# Altium PCB PCB.PcbDoc
Units mm, origin at the board's own origin, x right, y up, seen from the top; angles counter-clockwise.
Board outline 291.75 x 101.25 mm, 2 copper layers (Top Layer, Bottom Layer), stack 1.571 mm thick; 126 components, 18 nets, 931 pads, 0 vias.
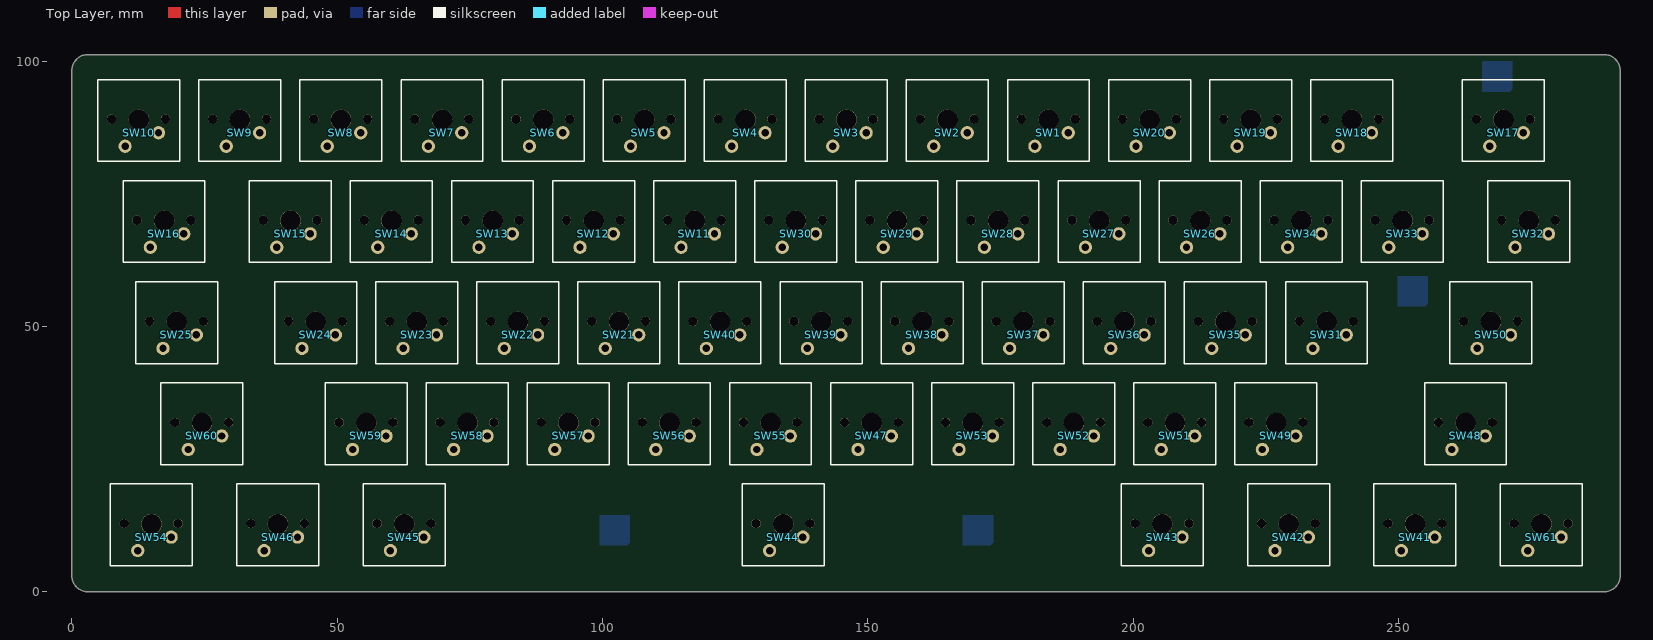
[diagram p0: Top Layer view]
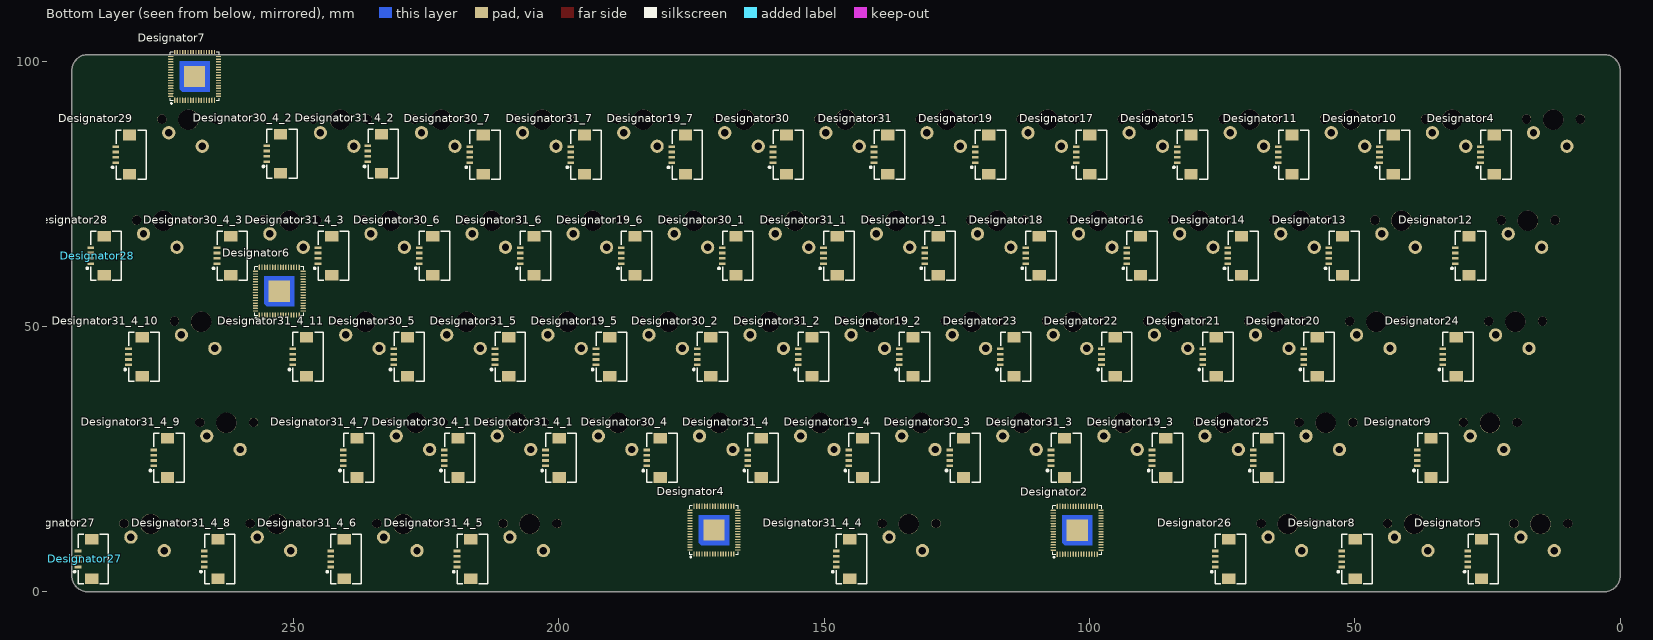
[diagram p1: Bottom Layer view, seen from below]

## Layer stack, top to bottom
Top Solder: solder mask 0.0102, Solder Resist, Dk 3.5
Top Layer: signal copper 0.0356
Dielectric 1: dielectric 1.5, FR-4, Dk 4.8
Bottom Layer: signal copper 0.0356
Bottom Solder: solder mask 0.0102, Solder Resist, Dk 3.5

## Board outline
0.006,3.006 0.006,98.256 cw(c3.006,98.256) 3.006,101.256 288.756,101.256 cw(c288.756,98.256) 291.756,98.256 291.756,3.006 cw(c288.756,3.006) 288.756,0.006 3.006,0.006 cw(c3.006,3.006)

## Design rules (kind name [scope] priority, off if disabled: settings)
Clearance [All] p1: gap=0.254 ignorepadtopadclearanceinfootprint=FALSE except(0: Arc-Hole Track-Hole SMDPad-Hole THPad-Hole Via-Hole Fill-Hole Poly-Hole Region-Hole Text-Hole)
PolygonConnect [All] p1: connectstyle=Relief reliefconductorwidth=0.254 reliefentries=4 polygonreliefangle="90 Angle" airgapwidth=0.254
RoutingVias [All] p1: holewidth=0.711 width=1.27 viastyle="Through Hole" minholewidth=0.711 minwidth=1.27 maxholewidth=0.711 maxwidth=1.27
SolderMaskExpansion [All] p1: expansion=0.102 istentingtop=FALSE
Width [All] p1: maxlimit=0.254 minlimit=0.254 preferedwidth=0.254
30 further rules are at their usual default settings.

## Classes and differential pairs
component class Connector: SW54

## Components (designator, comment, footprint, x,y, rotation, side; value= is the part's Value field where it differs from the comment)
Designator2 "Comment" "QFN64 9x9_L" 102.311,11.608 r180 bottom
Designator4 "Comment" FPC1.0-WT-4P 23.724,82.398 r90 bottom
Designator4 "Comment" "QFN64 9x9_L" 170.764,11.633 r180 bottom
Designator5 "Comment" FPC1.0-WT-4P 26.105,6.198 r90 bottom
Designator6 "Comment" "QFN64 9x9_L" 252.679,56.667 r180 bottom
Designator7 "Comment" "QFN64 9x9_L" 268.63,97.13 r180 bottom
Designator8 "Comment" FPC1.0-WT-4P 49.917,6.198 r90 bottom
Designator9 "Comment" FPC1.0-WT-4P 35.63,25.248 r90 bottom
Designator10 "Comment" FPC1.0-WT-4P 42.774,82.398 r90 bottom
Designator11 "Comment" FPC1.0-WT-4P 61.824,82.398 r90 bottom
Designator12 "Comment" FPC1.0-WT-4P 28.486,63.348 r90 bottom
Designator13 "Comment" FPC1.0-WT-4P 52.299,63.348 r90 bottom
Designator14 "Comment" FPC1.0-WT-4P 71.349,63.348 r90 bottom
Designator15 "Comment" FPC1.0-WT-4P 80.874,82.398 r90 bottom
Designator16 "Comment" FPC1.0-WT-4P 90.399,63.348 r90 bottom
Designator17 "Comment" FPC1.0-WT-4P 99.924,82.398 r90 bottom
Designator18 "Comment" FPC1.0-WT-4P 109.449,63.348 r90 bottom
Designator19 "Comment" FPC1.0-WT-4P 118.974,82.398 r90 bottom
Designator19_1 "Comment" FPC1.0-WT-4P 128.499,63.348 r90 bottom
Designator19_2 "Comment" FPC1.0-WT-4P 133.261,44.298 r90 bottom
Designator19_3 "Comment" FPC1.0-WT-4P 85.636,25.248 r90 bottom
Designator19_4 "Comment" FPC1.0-WT-4P 142.786,25.248 r90 bottom
Designator19_5 "Comment" FPC1.0-WT-4P 190.411,44.298 r90 bottom
Designator19_6 "Comment" FPC1.0-WT-4P 185.649,63.348 r90 bottom
Designator19_7 "Comment" FPC1.0-WT-4P 176.124,82.398 r90 bottom
Designator20 "Comment" FPC1.0-WT-4P 57.061,44.298 r90 bottom
Designator21 "Comment" FPC1.0-WT-4P 76.111,44.298 r90 bottom
Designator22 "Comment" FPC1.0-WT-4P 95.161,44.298 r90 bottom
Designator23 "Comment" FPC1.0-WT-4P 114.211,44.298 r90 bottom
Designator24 "Comment" FPC1.0-WT-4P 30.867,44.298 r90 bottom
Designator25 "Comment" FPC1.0-WT-4P 66.586,25.248 r90 bottom
Designator26 "Comment" FPC1.0-WT-4P 73.73,6.198 r90 bottom
Designator27 "Comment" FPC1.0-WT-4P 288.042,6.198 r90 bottom
Designator28 "Comment" FPC1.0-WT-4P 285.661,63.348 r90 bottom
Designator29 "Comment" FPC1.0-WT-4P 280.899,82.398 r90 bottom
Designator30 "Comment" FPC1.0-WT-4P 157.074,82.398 r90 bottom
Designator30_1 "Comment" FPC1.0-WT-4P 166.599,63.348 r90 bottom
Designator30_2 "Comment" FPC1.0-WT-4P 171.361,44.298 r90 bottom
Designator30_3 "Comment" FPC1.0-WT-4P 123.736,25.248 r90 bottom
Designator30_4 "Comment" FPC1.0-WT-4P 180.886,25.248 r90 bottom
Designator30_4_1 "Comment" FPC1.0-WT-4P 218.986,25.248 r90 bottom
Designator30_4_2 "Comment" FPC1.0-WT-4P 252.455,82.568 r90 bottom
Designator30_4_3 "Comment" FPC1.0-WT-4P 261.849,63.348 r90 bottom
Designator30_5 "Comment" FPC1.0-WT-4P 228.511,44.298 r90 bottom
Designator30_6 "Comment" FPC1.0-WT-4P 223.749,63.348 r90 bottom
Designator30_7 "Comment" FPC1.0-WT-4P 214.224,82.398 r90 bottom
Designator31 "Comment" FPC1.0-WT-4P 138.024,82.398 r90 bottom
Designator31_1 "Comment" FPC1.0-WT-4P 147.549,63.348 r90 bottom
Designator31_2 "Comment" FPC1.0-WT-4P 152.311,44.298 r90 bottom
Designator31_3 "Comment" FPC1.0-WT-4P 104.686,25.248 r90 bottom
Designator31_4 "Comment" FPC1.0-WT-4P 161.836,25.248 r90 bottom
Designator31_4_1 "Comment" FPC1.0-WT-4P 199.936,25.248 r90 bottom
Designator31_4_2 "Comment" FPC1.0-WT-4P 233.405,82.568 r90 bottom
Designator31_4_3 "Comment" FPC1.0-WT-4P 242.799,63.348 r90 bottom
Designator31_4_4 "Comment" FPC1.0-WT-4P 145.167,6.198 r90 bottom
Designator31_4_5 "Comment" FPC1.0-WT-4P 216.605,6.198 r90 bottom
Designator31_4_6 "Comment" FPC1.0-WT-4P 240.417,6.198 r90 bottom
Designator31_4_7 "Comment" FPC1.0-WT-4P 238.036,25.248 r90 bottom
Designator31_4_8 "Comment" FPC1.0-WT-4P 264.23,6.198 r90 bottom
Designator31_4_9 "Comment" FPC1.0-WT-4P 273.754,25.248 r90 bottom
Designator31_4_10 "Comment" FPC1.0-WT-4P 278.517,44.298 r90 bottom
Designator31_4_11 "Comment" FPC1.0-WT-4P 247.561,44.298 r90 bottom
Designator31_5 "Comment" FPC1.0-WT-4P 209.461,44.298 r90 bottom
Designator31_6 "Comment" FPC1.0-WT-4P 204.699,63.348 r90 bottom
Designator31_7 "Comment" FPC1.0-WT-4P 195.174,82.398 r90 bottom
SW1 "Cherry" SW_Cherry_MX_WS2812 184.069,88.983 r180 top
SW2 "Cherry" SW_Cherry_MX_WS2812 165.019,88.983 r180 top
SW3 "Cherry" SW_Cherry_MX_WS2812 145.969,88.983 r180 top
SW4 "Cherry" SW_Cherry_MX_WS2812 126.919,88.983 r180 top
SW5 "Cherry" SW_Cherry_MX_WS2812 107.869,88.983 r180 top
SW6 "Cherry" SW_Cherry_MX_WS2812 88.819,88.983 r180 top
SW7 "Cherry" SW_Cherry_MX_WS2812 69.769,88.983 r180 top
SW8 "Cherry" SW_Cherry_MX_WS2812 50.719,88.983 r180 top
SW9 "Cherry" SW_Cherry_MX_WS2812 31.669,88.983 r180 top
SW10 "Cherry" SW_Cherry_MX_WS2812 12.619,88.983 r180 top
SW11 "Cherry" SW_Cherry_MX_WS2812 117.394,69.933 r180 top
SW12 "Cherry" SW_Cherry_MX_WS2812 98.344,69.933 r180 top
SW13 "Cherry" SW_Cherry_MX_WS2812 79.294,69.933 r180 top
SW14 "Cherry" SW_Cherry_MX_WS2812 60.244,69.933 r180 top
SW15 "Cherry" SW_Cherry_MX_WS2812 41.194,69.933 r180 top
SW16 "Cherry" SW_Cherry_MX_WS2812 17.382,69.933 r180 top
SW17 "Cherry" SW_Cherry_MX_WS2812 269.794,88.983 r180 top
SW18 "Cherry" SW_Cherry_MX_WS2812 241.219,88.983 r180 top
SW19 "Cherry" SW_Cherry_MX_WS2812 222.169,88.983 r180 top
SW20 "Cherry" SW_Cherry_MX_WS2812 203.119,88.983 r180 top
SW21 "Cherry" SW_Cherry_MX_WS2812 103.106,50.883 r180 top
SW22 "Cherry" SW_Cherry_MX_WS2812 84.056,50.883 r180 top
SW23 "Cherry" SW_Cherry_MX_WS2812 65.006,50.883 r180 top
SW24 "Cherry" SW_Cherry_MX_WS2812 45.956,50.883 r180 top
SW25 "Cherry" SW_Cherry_MX_WS2812 19.763,50.883 r180 top
SW26 "Cherry" SW_Cherry_MX_WS2812 212.644,69.933 r180 top
SW27 "Cherry" SW_Cherry_MX_WS2812 193.594,69.933 r180 top
SW28 "Cherry" SW_Cherry_MX_WS2812 174.544,69.933 r180 top
SW29 "Cherry" SW_Cherry_MX_WS2812 155.494,69.933 r180 top
SW30 "Cherry" SW_Cherry_MX_WS2812 136.444,69.933 r180 top
SW31 "Cherry" SW_Cherry_MX_WS2812 236.456,50.883 r180 top
SW32 "Cherry" SW_Cherry_MX_WS2812 274.557,69.933 r180 top
SW33 "Cherry" SW_Cherry_MX_WS2812 250.744,69.933 r180 top
SW34 "Cherry" SW_Cherry_MX_WS2812 231.694,69.933 r180 top
SW35 "Cherry" SW_Cherry_MX_WS2812 217.406,50.883 r180 top
SW36 "Cherry" SW_Cherry_MX_WS2812 198.356,50.883 r180 top
SW37 "Cherry" SW_Cherry_MX_WS2812 179.306,50.883 r180 top
SW38 "Cherry" SW_Cherry_MX_WS2812 160.256,50.883 r180 top
SW39 "Cherry" SW_Cherry_MX_WS2812 141.206,50.883 r180 top
SW40 "Cherry" SW_Cherry_MX_WS2812 122.156,50.883 r180 top
SW41 "Cherry" SW_Cherry_MX_WS2812 253.126,12.783 r180 top
SW42 "Cherry" SW_Cherry_MX_WS2812 229.313,12.783 r180 top
SW43 "Cherry" SW_Cherry_MX_WS2812 205.501,12.783 r180 top
SW44 "Cherry" SW_Cherry_MX_WS2812 134.063,12.783 r180 top
SW45 "Cherry" SW_Cherry_MX_WS2812 62.626,12.783 r180 top
SW46 "Cherry" SW_Cherry_MX_WS2812 38.813,12.783 r180 top
SW47 "Cherry" SW_Cherry_MX_WS2812 150.731,31.833 r180 top
SW48 "Cherry" SW_Cherry_MX_WS2812 262.65,31.833 r180 top
SW49 "Cherry" SW_Cherry_MX_WS2812 226.931,31.833 r180 top
SW50 "Cherry" SW_Cherry_MX_WS2812 267.413,50.883 r180 top
SW51 "Cherry" SW_Cherry_MX_WS2812 207.881,31.833 r180 top
SW52 "Cherry" SW_Cherry_MX_WS2812 188.831,31.833 r180 top
SW53 "Cherry" SW_Cherry_MX_WS2812 169.781,31.833 r180 top
SW54 "Cherry" SW_Cherry_MX_WS2812 15.001,12.783 r180 top
SW55 "Cherry" SW_Cherry_MX_WS2812 131.681,31.833 r180 top
SW56 "Cherry" SW_Cherry_MX_WS2812 112.631,31.833 r180 top
SW57 "Cherry" SW_Cherry_MX_WS2812 93.581,31.833 r180 top
SW58 "Cherry" SW_Cherry_MX_WS2812 74.531,31.833 r180 top
SW59 "Cherry" SW_Cherry_MX_WS2812 55.481,31.833 r180 top
SW60 "Cherry" SW_Cherry_MX_WS2812 24.526,31.833 r180 top
SW61 "Cherry" SW_Cherry_MX_WS2812 276.938,12.783 r180 top

## Footprints (in the part's own frame and the unit in brackets; to place one, negate y for a bottom-side part, rotate by r counter-clockwise, add the part's x,y. Pads: shape width x height; smd on the part's side, far side on the other; paste and mask are expansions set on the pad)
FPC1.0-WT-4P [mm] "卧贴翻盖FPC，脚距1mm，不含脚（长8.9mm，宽5.2mm，高1.96mm）"
  rect 2x2.5 smd: 0(-3.69,0) 0(3.69,0)
  rect 0.5x1.25 smd: 1(-1.5,2.575) 2(-0.5,2.575) 3(0.5,2.575) 4(1.5,2.575)
  silkscreen extent -4.64,-3.18 4.64,3.31, body extent -4.45,-3.15 4.45,2.85, height 2
"QFN64 9x9_L" [mm] "64脚，长x宽x高：9x9x1mm，脚距：0.5mm"
  rect 0.25x1 smd: 1(-3.75,-4.5)
  oval 0.25x1 smd: 2(-3.25,-4.5) 3(-2.75,-4.5) 4(-2.25,-4.5) 5(-1.75,-4.5) 6(-1.25,-4.5) 7(-0.75,-4.5) 8(-0.25,-4.5) 9(0.25,-4.5) 10(0.75,-4.5) 11(1.25,-4.5) 12(1.75,-4.5) 13(2.25,-4.5) 14(2.75,-4.5) 15(3.25,-4.5) 16(3.75,-4.5) 33(3.75,4.5) 34(3.25,4.5) 35(2.75,4.5) 36(2.25,4.5) 37(1.75,4.5) 38(1.25,4.5) 39(0.75,4.5) 40(0.25,4.5) 41(-0.25,4.5) 42(-0.75,4.5) 43(-1.25,4.5) 44(-1.75,4.5) 45(-2.25,4.5) 46(-2.75,4.5) 47(-3.25,4.5) 48(-3.75,4.5)
  oval 1x0.25 smd: 17(4.5,-3.75) 18(4.5,-3.25) 19(4.5,-2.75) 20(4.5,-2.25) 21(4.5,-1.75) 22(4.5,-1.25) 23(4.5,-0.75) 24(4.5,-0.25) 25(4.5,0.25) 26(4.5,0.75) 27(4.5,1.25) 28(4.5,1.75) 29(4.5,2.25) 30(4.5,2.75) 31(4.5,3.25) 32(4.5,3.75) 49(-4.5,3.75) 50(-4.5,3.25) 51(-4.5,2.75) 52(-4.5,2.25) 53(-4.5,1.75) 54(-4.5,1.25) 55(-4.5,0.75) 56(-4.5,0.25) 57(-4.5,-0.25) 58(-4.5,-0.75) 59(-4.5,-1.25) 60(-4.5,-1.75) 61(-4.5,-2.25) 62(-4.5,-2.75) 63(-4.5,-3.25) 64(-4.5,-3.75)
  rect 4x4 smd: 69(0,0)
  Top Layer region: -2.85,2.85 2.85,2.85 2.85,-2.85 -2.375,-2.85 -2.85,-2.375
  silkscreen extent -4.6,-5.2 4.6,4.6, body extent -4.51,-4.51 4.51,4.51, height 0.95
SW_Cherry_MX_WS2812 [mm] "WS2812键帽"
  round 2.5 hole 1.4: 1(-3.708,2.464) 2(2.591,5.004)
  round 1.75 hole 1.75: ""(-5.004,-0.102) ""(5.131,-0.102)
  round 3.85 hole 3.85: ""(0,0)
  silkscreen extent -7.7,-7.57 7.75,7.85, body extent -9.06,-9.19 9.26,9.11, height 19.05

## Part data
SW1 SW2 SW3 SW4 SW5 SW6 SW7 SW8 SW9 SW10 SW11 SW12 SW13 SW14 SW15 SW16 SW17 SW18 SW19 SW20 SW21 SW22 SW23 SW24 SW25 SW26 SW27 SW28 SW29 SW30 SW31 SW32 SW33 SW34 SW35 SW36 SW37 SW38 SW39 SW40 SW41 SW42 SW43 SW44 SW45 SW46 SW47 SW48 SW49 SW50 SW51 SW52 SW53 SW54 SW55 SW56 SW57 SW58 SW59 SW60 SW61: library part LSW, "带灯机械按键开关", BOM名称=带灯机械按键开关, 学习资源=www.ooocke.com, 版权归属=源创客

## Nets (pads, with @x,y where several pads share a name; then routed paths per layer and width w, separated by ;. In a path a pad name is that pad's centre, name@x,y a point inside that pad or via, vN(x,y) a via of type N, cw(c..) or ccw(c..) an arc to the next point about the centre after c; other vN are vias at no path point)
GND: 
NetC1_1: 
NetC1_2: 
NetC10_2: 
NetC11_2: 
NetR1_2: 
NetR5_1: 
NetS1_2: 
NetS2_2: 
NetS3_2: 
NetS4_2: 
NetS5_2: 
NetS6_2: 
NetS7_2: 
NetS8_2: 
VBUS: 
VCC5V-B: 
VSENSE-B: 
pads on no net: Designator2.1 Designator2.2 Designator2.3 Designator2.4 Designator2.5 Designator2.6 Designator2.7 Designator2.8 Designator2.9 Designator2.10 Designator2.11 Designator2.12 Designator2.13 Designator2.14 Designator2.15 Designator2.16 Designator2.17 Designator2.18 Designator2.19 Designator2.20 Designator2.21 Designator2.22 Designator2.23 Designator2.24 Designator2.25 Designator2.26 Designator2.27 Designator2.28 Designator2.29 Designator2.30 Designator2.31 Designator2.32 Designator2.33 Designator2.34 Designator2.35 Designator2.36 Designator2.37 Designator2.38 Designator2.39 Designator2.40 Designator2.41 Designator2.42 Designator2.43 Designator2.44 Designator2.45 Designator2.46 Designator2.47 Designator2.48 Designator2.49 Designator2.50 Designator2.51 Designator2.52 Designator2.53 Designator2.54 Designator2.55 Designator2.56 Designator2.57 Designator2.58 Designator2.59 Designator2.60 Designator2.61 Designator2.62 Designator2.63 Designator2.64 Designator2.69 Designator4.0 Designator4.1 Designator4.2 Designator4.3 Designator4.4 Designator4.5 Designator4.6 Designator4.7 Designator4.8 Designator4.9 Designator4.10 Designator4.11 Designator4.12 Designator4.13 Designator4.14 Designator4.15 Designator4.16 Designator4.17 Designator4.18 Designator4.19 Designator4.20 Designator4.21 Designator4.22 Designator4.23 Designator4.24 Designator4.25 Designator4.26 Designator4.27 Designator4.28 Designator4.29 Designator4.30 Designator4.31 Designator4.32 Designator4.33 Designator4.34 Designator4.35 Designator4.36 Designator4.37 Designator4.38 Designator4.39 Designator4.40 Designator4.41 Designator4.42 Designator4.43 Designator4.44 Designator4.45 Designator4.46 Designator4.47 Designator4.48 Designator4.49 Designator4.50 Designator4.51 Designator4.52 Designator4.53 Designator4.54 Designator4.55 Designator4.56 Designator4.57 Designator4.58 Designator4.59 Designator4.60 Designator4.61 Designator4.62 Designator4.63 Designator4.64 Designator4.69 Designator5.0 Designator5.1 Designator5.2 Designator5.3 Designator5.4 Designator6.1 Designator6.2 Designator6.3 Designator6.4 Designator6.5 Designator6.6 Designator6.7 Designator6.8 Designator6.9 Designator6.10 Designator6.11 Designator6.12 Designator6.13 Designator6.14 Designator6.15 Designator6.16 Designator6.17 Designator6.18 Designator6.19 Designator6.20 Designator6.21 Designator6.22 Designator6.23 Designator6.24 Designator6.25 Designator6.26 Designator6.27 Designator6.28 Designator6.29 Designator6.30 Designator6.31 Designator6.32 Designator6.33 Designator6.34 Designator6.35 Designator6.36 Designator6.37 Designator6.38 Designator6.39 Designator6.40 Designator6.41 Designator6.42 Designator6.43 Designator6.44 Designator6.45 Designator6.46 Designator6.47 Designator6.48 Designator6.49 Designator6.50 Designator6.51 Designator6.52 Designator6.53 Designator6.54 Designator6.55 Designator6.56 Designator6.57 Designator6.58 Designator6.59 Designator6.60 Designator6.61 Designator6.62 Designator6.63 Designator6.64 Designator6.69 Designator7.1 Designator7.2 Designator7.3 Designator7.4 Designator7.5 Designator7.6 Designator7.7 Designator7.8 Designator7.9 Designator7.10 Designator7.11 Designator7.12 Designator7.13 Designator7.14 Designator7.15 Designator7.16 Designator7.17 Designator7.18 Designator7.19 Designator7.20 Designator7.21 Designator7.22 Designator7.23 Designator7.24 Designator7.25 Designator7.26 Designator7.27 Designator7.28 Designator7.29 Designator7.30 Designator7.31 Designator7.32 Designator7.33 Designator7.34 Designator7.35 Designator7.36 Designator7.37 Designator7.38 Designator7.39 Designator7.40 Designator7.41 Designator7.42 Designator7.43 Designator7.44 Designator7.45 Designator7.46 Designator7.47 Designator7.48 Designator7.49 Designator7.50 Designator7.51 Designator7.52 Designator7.53 Designator7.54 Designator7.55 Designator7.56 Designator7.57 Designator7.58 Designator7.59 Designator7.60 Designator7.61 Designator7.62 Designator7.63 Designator7.64 Designator7.69 Designator8.0 Designator8.1 Designator8.2 Designator8.3 Designator8.4 Designator9.0 Designator9.1 Designator9.2 Designator9.3 Designator9.4 Designator10.0 Designator10.1 Designator10.2 Designator10.3 Designator10.4 Designator11.0 Designator11.1 Designator11.2 Designator11.3 Designator11.4 Designator12.0 Designator12.1 Designator12.2 Designator12.3 Designator12.4 Designator13.0 Designator13.1 Designator13.2 Designator13.3 Designator13.4 Designator14.0 Designator14.1 Designator14.2 Designator14.3 Designator14.4 Designator15.0 Designator15.1 Designator15.2 Designator15.3 Designator15.4 Designator16.0 Designator16.1 Designator16.2 Designator16.3 Designator16.4 Designator17.0 Designator17.1 Designator17.2 Designator17.3 Designator17.4 Designator18.0 Designator18.1 Designator18.2 Designator18.3 Designator18.4 Designator19.0 Designator19.1 Designator19.2 Designator19.3 Designator19.4 Designator19_1.0 Designator19_1.1 Designator19_1.2 Designator19_1.3 Designator19_1.4 Designator19_2.0 Designator19_2.1 Designator19_2.2 Designator19_2.3 Designator19_2.4 Designator19_3.0 Designator19_3.1 Designator19_3.2 Designator19_3.3 Designator19_3.4 Designator19_4.0 Designator19_4.1 Designator19_4.2 Designator19_4.3 Designator19_4.4 Designator19_5.0 Designator19_5.1 Designator19_5.2 Designator19_5.3 Designator19_5.4 Designator19_6.0 Designator19_6.1 Designator19_6.2 Designator19_6.3 Designator19_6.4 Designator19_7.0 Designator19_7.1 Designator19_7.2 Designator19_7.3 Designator19_7.4 Designator20.0 Designator20.1 Designator20.2 Designator20.3 Designator20.4 Designator21.0 Designator21.1 Designator21.2 Designator21.3 Designator21.4 Designator22.0 Designator22.1 Designator22.2 Designator22.3 Designator22.4 Designator23.0 Designator23.1 Designator23.2 Designator23.3 Designator23.4 Designator24.0 Designator24.1 Designator24.2 Designator24.3 Designator24.4 Designator25.0 Designator25.1 Designator25.2 Designator25.3 Designator25.4 Designator26.0 Designator26.1 Designator26.2 Designator26.3 Designator26.4 Designator27.0 Designator27.1 Designator27.2 Designator27.3 Designator27.4 Designator28.0 Designator28.1 Designator28.2 Designator28.3 Designator28.4 Designator29.0 Designator29.1 Designator29.2 Designator29.3 Designator29.4 Designator30.0 Designator30.1 Designator30.2 Designator30.3 Designator30.4 Designator30_1.0 Designator30_1.1 Designator30_1.2 Designator30_1.3 Designator30_1.4 Designator30_2.0 Designator30_2.1 Designator30_2.2 Designator30_2.3 Designator30_2.4 Designator30_3.0 Designator30_3.1 Designator30_3.2 Designator30_3.3 Designator30_3.4 Designator30_4.0 Designator30_4.1 Designator30_4.2 Designator30_4.3 Designator30_4.4 Designator30_4_1.0 Designator30_4_1.1 Designator30_4_1.2 Designator30_4_1.3 Designator30_4_1.4 Designator30_4_2.0 Designator30_4_2.1 Designator30_4_2.2 Designator30_4_2.3 Designator30_4_2.4 Designator30_4_3.0 Designator30_4_3.1 Designator30_4_3.2 Designator30_4_3.3 Designator30_4_3.4 Designator30_5.0 Designator30_5.1 Designator30_5.2 Designator30_5.3 Designator30_5.4 Designator30_6.0 Designator30_6.1 Designator30_6.2 Designator30_6.3 Designator30_6.4 Designator30_7.0 Designator30_7.1 Designator30_7.2 Designator30_7.3 Designator30_7.4 Designator31.0 Designator31.1 Designator31.2 Designator31.3 Designator31.4 Designator31_1.0 Designator31_1.1 Designator31_1.2 Designator31_1.3 Designator31_1.4 Designator31_2.0 Designator31_2.1 Designator31_2.2 Designator31_2.3 Designator31_2.4 Designator31_3.0 Designator31_3.1 Designator31_3.2 Designator31_3.3 Designator31_3.4 Designator31_4.0 Designator31_4.1 Designator31_4.2 Designator31_4.3 Designator31_4.4 Designator31_4_1.0 Designator31_4_1.1 Designator31_4_1.2 Designator31_4_1.3 Designator31_4_1.4 Designator31_4_2.0 Designator31_4_2.1 Designator31_4_2.2 Designator31_4_2.3 Designator31_4_2.4 Designator31_4_3.0 Designator31_4_3.1 Designator31_4_3.2 Designator31_4_3.3 Designator31_4_3.4 Designator31_4_4.0 Designator31_4_4.1 Designator31_4_4.2 Designator31_4_4.3 Designator31_4_4.4 Designator31_4_5.0 Designator31_4_5.1 Designator31_4_5.2 Designator31_4_5.3 Designator31_4_5.4 Designator31_4_6.0 Designator31_4_6.1 Designator31_4_6.2 Designator31_4_6.3 Designator31_4_6.4 Designator31_4_7.0 Designator31_4_7.1 Designator31_4_7.2 Designator31_4_7.3 Designator31_4_7.4 Designator31_4_8.0 Designator31_4_8.1 Designator31_4_8.2 Designator31_4_8.3 Designator31_4_8.4 Designator31_4_9.0 Designator31_4_9.1 Designator31_4_9.2 Designator31_4_9.3 Designator31_4_9.4 Designator31_4_10.0 Designator31_4_10.1 Designator31_4_10.2 Designator31_4_10.3 Designator31_4_10.4 Designator31_4_11.0 Designator31_4_11.1 Designator31_4_11.2 Designator31_4_11.3 Designator31_4_11.4 Designator31_5.0 Designator31_5.1 Designator31_5.2 Designator31_5.3 Designator31_5.4 Designator31_6.0 Designator31_6.1 Designator31_6.2 Designator31_6.3 Designator31_6.4 Designator31_7.0 Designator31_7.1 Designator31_7.2 Designator31_7.3 Designator31_7.4 SW1. SW1.1 SW1.2 SW2. SW2.1 SW2.2 SW3. SW3.1 SW3.2 SW4. SW4.1 SW4.2 SW5. SW5.1 SW5.2 SW6. SW6.1 SW6.2 SW7. SW7.1 SW7.2 SW8. SW8.1 SW8.2 SW9. SW9.1 SW9.2 SW10. SW10.1 SW10.2 SW11. SW11.1 SW11.2 SW12. SW12.1 SW12.2 SW13. SW13.1 SW13.2 SW14. SW14.1 SW14.2 SW15. SW15.1 SW15.2 SW16. SW16.1 SW16.2 SW17. SW17.1 SW17.2 SW18. SW18.1 SW18.2 SW19. SW19.1 SW19.2 SW20. SW20.1 SW20.2 SW21. SW21.1 SW21.2 SW22. SW22.1 SW22.2 SW23. SW23.1 SW23.2 SW24. SW24.1 SW24.2 SW25. SW25.1 SW25.2 SW26. SW26.1 SW26.2 SW27. SW27.1 SW27.2 SW28. SW28.1 SW28.2 SW29. SW29.1 SW29.2 SW30. SW30.1 SW30.2 SW31. SW31.1 SW31.2 SW32. SW32.1 SW32.2 SW33. SW33.1 SW33.2 SW34. SW34.1 SW34.2 SW35. SW35.1 SW35.2 SW36. SW36.1 SW36.2 SW37. SW37.1 SW37.2 SW38. SW38.1 SW38.2 SW39. SW39.1 SW39.2 SW40. SW40.1 SW40.2 SW41. SW41.1 SW41.2 SW42. SW42.1 SW42.2 SW43. SW43.1 SW43.2 SW44. SW44.1 SW44.2 SW45. SW45.1 SW45.2 SW46. SW46.1 SW46.2 SW47. SW47.1 SW47.2 SW48. SW48.1 SW48.2 SW49. SW49.1 SW49.2 SW50. SW50.1 SW50.2 SW51. SW51.1 SW51.2 SW52. SW52.1 SW52.2 SW53. SW53.1 SW53.2 SW54. SW54.1 SW54.2 SW55. SW55.1 SW55.2 SW56. SW56.1 SW56.2 SW57. SW57.1 SW57.2 SW58. SW58.1 SW58.2 SW59. SW59.1 SW59.2 SW60. SW60.1 SW60.2 SW61. SW61.1 SW61.2

## Silkscreen, mask and mechanical layers (free items; w line width, h text height)
Mechanical 1:
  the board outline again, w0.013
Mechanical 2:
  circle w0.013: c12.619,88.983 r0.5
  circle w0.013: c79.294,69.933 r0.5
  circle w0.013: c69.769,88.983 r0.5
  circle w0.013: c98.344,69.933 r0.5
  circle w0.013: c88.819,88.983 r0.5
  circle w0.013: c269.794,88.983 r0.5
  circle w0.013: c274.557,69.933 r0.5
  circle w0.013: c60.244,69.933 r0.5
  circle w0.013: c50.719,88.983 r0.5
  circle w0.013: c155.494,69.933 r0.5
  circle w0.013: c145.969,88.983 r0.5
  circle w0.013: c174.544,69.933 r0.5
  circle w0.013: c165.019,88.983 r0.5
  circle w0.013: c117.394,69.933 r0.5
  circle w0.013: c107.869,88.983 r0.5
  circle w0.013: c136.444,69.933 r0.5
  circle w0.013: c126.919,88.983 r0.5
  circle w0.013: c19.763,50.883 r0.5
  circle w0.013: c17.382,69.933 r0.5
  circle w0.013: c55.481,31.833 r0.5
  circle w0.013: c31.669,88.983 r0.5
  circle w0.013: c276.938,12.783 r0.5
  circle w0.013: c134.063,12.783 r0.5
  circle w0.013: c267.413,50.883 r0.5
  circle w0.013: c262.65,31.833 r0.5
  circle w0.013: c15.001,12.783 r0.5
  circle w0.013: c41.194,69.933 r0.5
  circle w0.013: c24.526,31.833 r0.5
  circle w0.013: c45.956,50.883 r0.5
  circle w0.013: c131.681,31.833 r0.5
  circle w0.013: c112.631,31.833 r0.5
  circle w0.013: c169.781,31.833 r0.5
  circle w0.013: c150.731,31.833 r0.5
  circle w0.013: c236.456,50.883 r0.5
  circle w0.013: c217.406,50.883 r0.5
  circle w0.013: c93.581,31.833 r0.5
  circle w0.013: c74.531,31.833 r0.5
  circle w0.013: c205.501,12.783 r0.5
  circle w0.013: c62.626,12.783 r0.5
  circle w0.013: c253.126,12.783 r0.5
  circle w0.013: c229.313,12.783 r0.5
  circle w0.013: c207.881,31.833 r0.5
  circle w0.013: c188.831,31.833 r0.5
  circle w0.013: c38.813,12.783 r0.5
  circle w0.013: c226.931,31.833 r0.5
  circle w0.013: c231.694,69.933 r0.5
  circle w0.013: c222.169,88.983 r0.5
  circle w0.013: c250.744,69.933 r0.5
  circle w0.013: c241.219,88.983 r0.5
  circle w0.013: c193.594,69.933 r0.5
  circle w0.013: c184.069,88.983 r0.5
  circle w0.013: c212.644,69.933 r0.5
  circle w0.013: c203.119,88.983 r0.5
  circle w0.013: c160.256,50.883 r0.5
  circle w0.013: c141.206,50.883 r0.5
  circle w0.013: c198.356,50.883 r0.5
  circle w0.013: c179.306,50.883 r0.5
  circle w0.013: c84.056,50.883 r0.5
  circle w0.013: c65.006,50.883 r0.5
  circle w0.013: c122.156,50.883 r0.5
  circle w0.013: c103.106,50.883 r0.5